# Altium PCB PCB_Платы-для-диплома_2_2026-05-31.pcbdoc
Units mm, origin at the board's own origin, x right, y up, seen from the top; angles counter-clockwise.
Board outline 126.75 x 88.39 mm, 2 copper layers (Top Layer, Bottom Layer); 15 components, 14 nets, 86 pads, 0 vias.
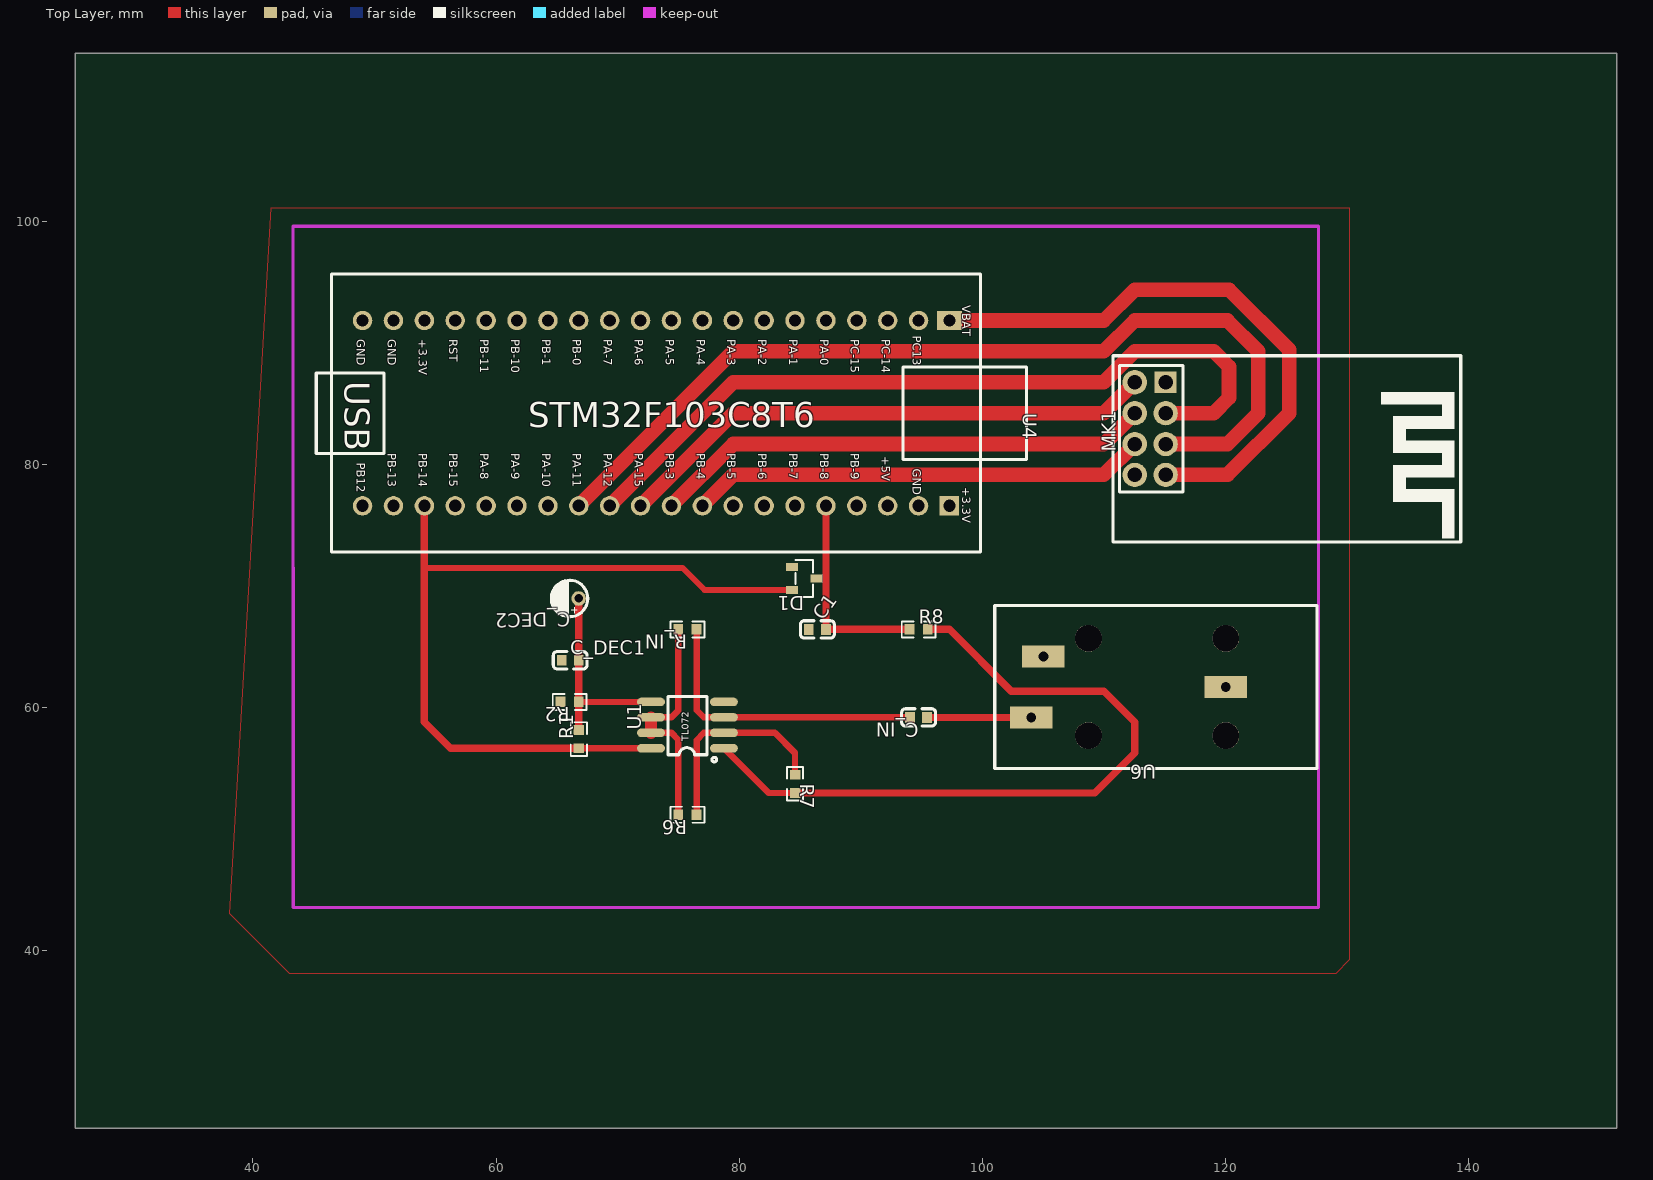
[diagram p0: Top Layer view]
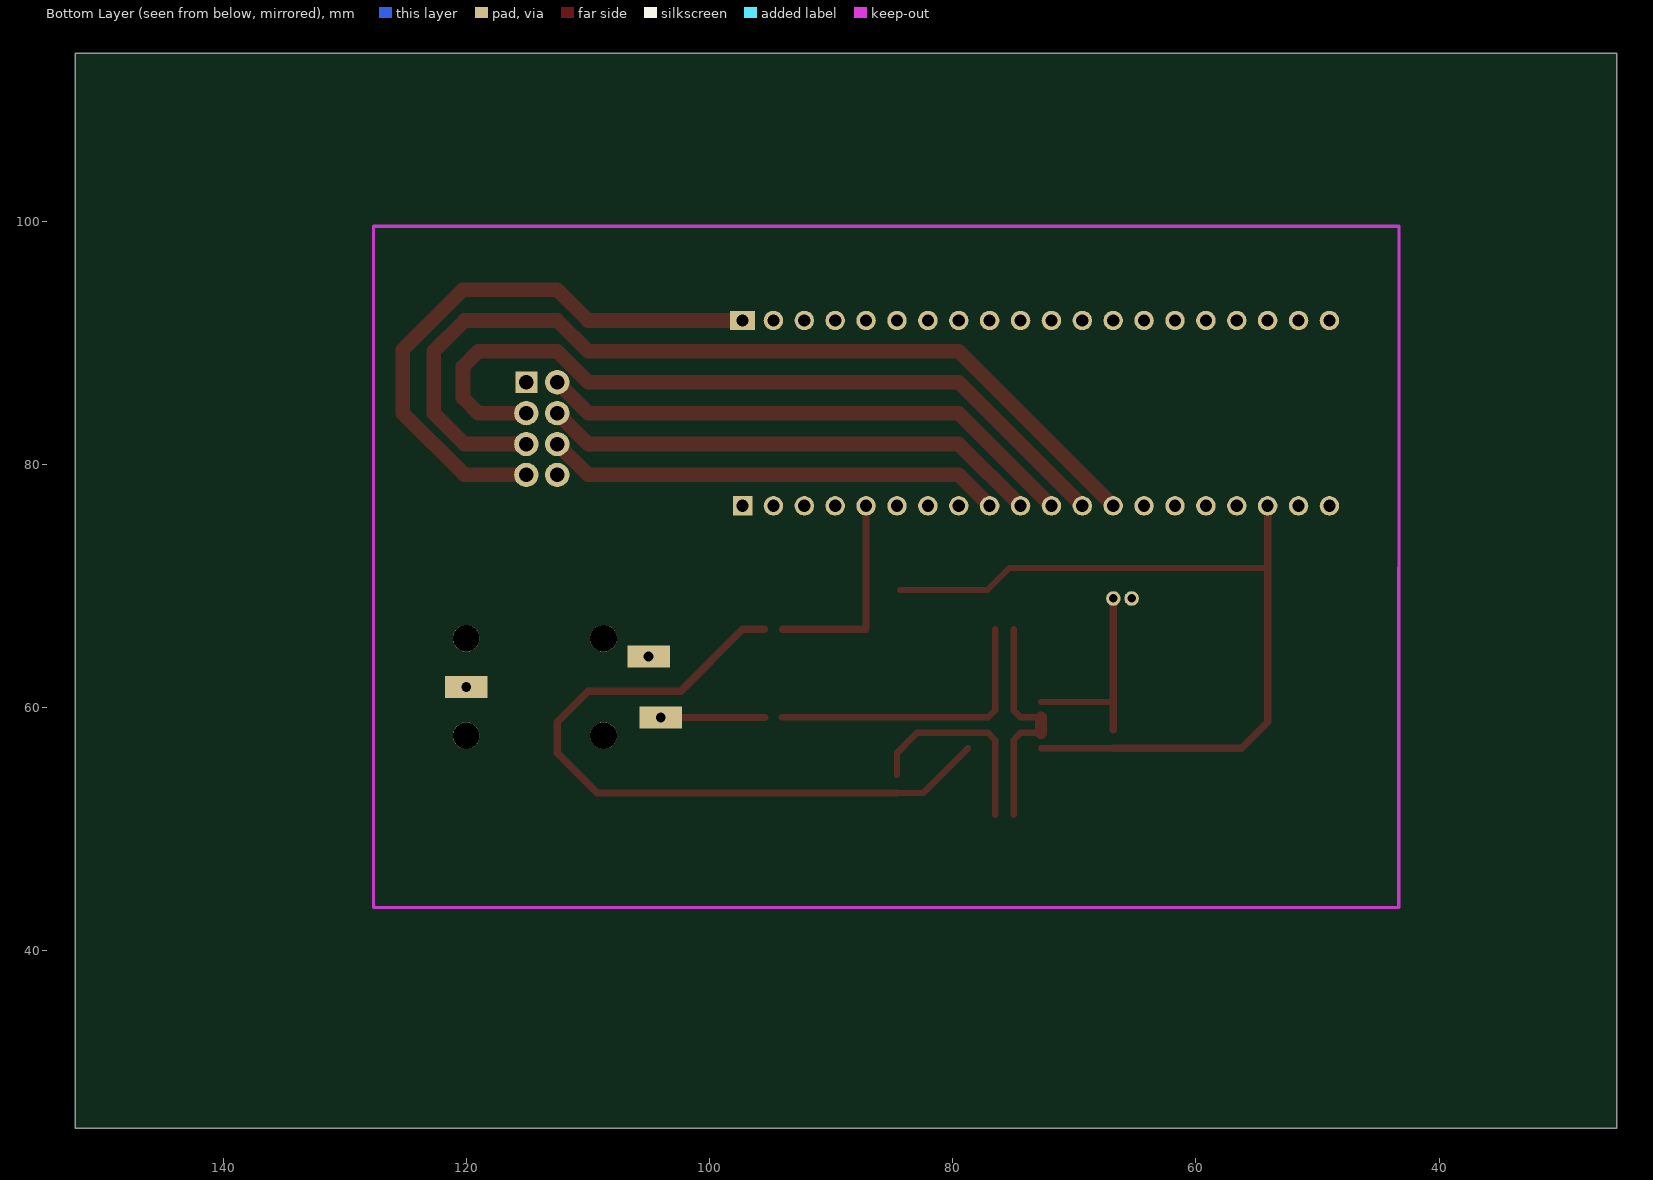
[diagram p1: Bottom Layer view, seen from below]

## Layer stack, top to bottom
Top Layer: signal copper (thickness not stored)
Dielectric: dielectric 0.32, FR-4, Dk 4.8
Bottom Layer: signal copper (thickness not stored)

## Board outline
152.149,25.4 25.4,25.4 25.4,113.792 152.149,113.792

## Components (designator, comment, footprint, x,y, rotation, side; value= is the part's Value field where it differs from the comment)
C1 "100pf" C0603 86.422,66.421 r0 top
C_DEC1 "0.1u" C0603 66.093,63.881 r0 top
C_DEC2 "10u" CAP-D3.0×F1.5 66.042,68.961 r180 top
C_IN "1u" C0603 94.742,59.182 r180 top
D1 "BAT54S-MS" SOT-23-3_L2.9-W1.3-P1.90-LS2.4-BR 85.344,70.612 r180 top
MK1 "2.4GHz" WIRELM-SMD_L28.6-W15.3-P2.54_NRF24L01 113.792,82.931 r90 top
R1 "1k" R0603 66.802,57.404 r90 top
R2 "1k" R0603 66.04,60.452 r180 top
R6 "10k" R0603 75.74,51.181 r180 top
R7 "47k" R0603 84.582,53.721 r270 top
R8 "1k" R0603 94.742,66.421 r0 top
R_IN "1M" R0603 75.74,66.421 r180 top
U1 "TL072" TL072 76.2,59.182 r90 top
U4 "Blue_Pill" "STM32F103C8T6-BLUEPILL 1" 74.422,84.201 r270 top
U6 "ST-008S-05" ST-008S-05 127.508,54.982 r180 top

## Footprints (in the part's own frame and the unit in brackets; to place one, negate y for a bottom-side part, rotate by r counter-clockwise, add the part's x,y. Pads: shape width x height; smd on the part's side, far side on the other; paste and mask are expansions set on the pad)
C0603 [mm]
  rect 0.8x0.9 smd paste+0 mask+0.051: 1(-0.7,0) 2(0.7,0)
  silkscreen extent -1.39,-0.71 1.39,0.71
CAP-D3.0×F1.5 [mm]
  round 1.2 hole 0.7 paste+0 mask+0.102: 1(-0.751,0) 2(0.751,0)
  silkscreen extent -1.5,-1.5 1.5,1.5
R0603 [mm]
  rect 0.806x0.864 smd paste-100 mask+0.051: 1(-0.753,0) 2(0.753,0)
  silkscreen extent -1.39,-0.66 1.39,0.66
SOT-23-3_L2.9-W1.3-P1.90-LS2.4-BR [mm]
  rect 1x0.65 smd paste+0 mask+0.051: 1(1,-0.95) 2(1,0.95) 3(-1,0)
  silkscreen extent -0.73,-1.53 0.73,1.53
ST-008S-05 [mm]
  rect 3.5x1.8 hole 0.8 paste+0 mask+0.051: 2(7.5,-6.7) 3(22.5,-9.2) 4(23.5,-4.2)
  round 2.2 hole 2.2 unplated paste+0: ""(7.5,-2.7) ""(7.5,-10.7) ""(18.8,-10.7) ""(18.8,-2.7)
  silkscreen extent 0,-13.4 26.5,0
"STM32F103C8T6-BLUEPILL 1" [mm]
  rect 1.6x2.032 hole 1 paste+0 mask+0.102: 1(-7.62,22.86)
  round 1.6 hole 1 paste+0 mask+0.102: 2(-7.62,20.32) 3(-7.62,17.78) 4(-7.62,15.24) 5(-7.62,12.7) 6(-7.62,10.16) 7(-7.62,7.62) 8(-7.62,5.08) 9(-7.62,2.54) 10(-7.62,0) 11(-7.62,-2.54) 12(-7.62,-5.08) 13(-7.62,-7.62) 14(-7.62,-10.16) 15(-7.62,-12.7) 16(-7.62,-15.24) 17(-7.62,-17.78) 18(-7.62,-20.32) 19(-7.62,-22.86) 20(-7.62,-25.4) 21(7.62,-25.4) 22(7.62,-22.86) 23(7.62,-20.32) 24(7.62,-17.78) 25(7.62,-15.24) 26(7.62,-12.7) 27(7.62,-10.16) 28(7.62,-7.62) 29(7.62,-5.08) 30(7.62,-2.54) 31(7.62,0) 32(7.62,2.54) 33(7.62,5.08) 34(7.62,7.62) 35(7.62,10.16) 36(7.62,12.7) 37(7.62,15.24) 38(7.62,17.78) 39(7.62,20.32)
  rect 1.6x1.6 hole 1 paste+0 mask+0.102: 40(7.62,22.86)
  silkscreen extent -11.43,-29.21 11.43,29.21
TL072 [mil]
  oval 27.56x90 smd paste+0 mask+4: 1(-100,-100) 2(-50,-100) 3(0,-100) 4(50,-100) 5(50,136.22) 6(0,136.22) 7(-50,136.22) 8(-100,136.22)
  silkscreen extent -144,-76 68,81
WIRELM-SMD_L28.6-W15.3-P2.54_NRF24L01 [mm]
  rect 1.8x1.8 hole 1.2 paste+0 mask+0.051: 1(3.807,-1.27)
  round 2 hole 1.2 paste+0 mask+0.051: 2(3.81,1.27) 3(1.27,-1.27) 4(1.27,1.27) 5(-1.27,-1.27) 6(-1.27,1.27) 7(-3.81,-1.27) 8(-3.81,1.27)
  silkscreen extent -9.31,-25.53 5.99,3.07

## Nets (pads, with @x,y where several pads share a name; then routed paths per layer and width w, separated by ;. In a path a pad name is that pad's centre, name@x,y a point inside that pad or via, vN(x,y) a via of type N, cw(c..) or ccw(c..) an arc to the next point about the centre after c; other vN are vias at no path point)
ADC_IN0: C1.2 D1.3 R8.1 U4.36 | length 17
  Top Layer w0.6: U4.36 C1.2 R8.1
C_DEC1_2: C_DEC1.2 C_DEC2.1 R1.2 R2.1 U1.5 | length 16.8
  Top Layer w0.525: R2.1 U1.5
  Top Layer w0.6: C_DEC1.2 R2.1 ; C_DEC1.2 C_DEC2.1 ; R1.2 R2.1@66.802,60.452
GND: C1.1 C_DEC1.1 C_DEC2.2 D1.1 MK1.8 R2.2 U1.4 U4.2 U4.21 U4.22 U6.2
IN: C_IN.1 U6.4 | length 8.6
  Top Layer w0.6: C_IN.1 U6.4
MK1_2: MK1.2 U4.30 | length 44.8
  Top Layer w1.2: U4.30 79.502,84.201 109.982,84.201 MK1.2
MK1_3: MK1.3 U4.29 | length 65
  Top Layer w1.2: U4.29 79.502,86.741 109.982,86.741 112.522,89.281 118.999,89.281 120.269,88.011 120.269,85.471 118.999,84.201 MK1.3
MK1_4: MK1.4 U4.31 | length 41.3
  Top Layer w1.2: U4.31 79.502,81.661 109.982,81.661 MK1.4
MK1_5: MK1.5 U4.28 | length 77
  Top Layer w1.2: U4.28 79.502,89.281 109.982,89.281 112.522,91.821 120.142,91.821 122.682,89.281 122.682,84.201 120.142,81.661 MK1.5
MK1_6: MK1.6 U4.32 | length 37.7
  Top Layer w1.2: U4.32 79.502,79.121 109.982,79.121 MK1.6
U1_1: R7.2 R8.2 U1.1 | length 59.4
  Top Layer w0.525: U1.1 82.414,52.968 R7.2
  Top Layer w0.6: R7.2 109.229,52.968 112.522,56.261 112.522,58.801 109.982,61.341 102.362,61.341 97.282,66.421 R8.2
U1_2: R6.1 R7.1 U1.2 | length 16.9
  Top Layer w0.525: R6.1 76.492,57.315 77.089,57.912 U1.2 82.931,57.912 84.582,56.261 R7.1
U1_3: C_IN.2 R_IN.1 U1.3 | length 24.4
  Top Layer w0.525: R_IN.1 76.492,59.779 77.089,59.182 U1.3 C_IN.2
V_REF: R6.2 R_IN.2 U1.6 U1.7 | length 19.1
  Top Layer w0.525: U1.7 74.422,57.912 74.986,57.348 R6.2 ; U1.6 74.422,59.182 74.986,59.746 R_IN.2
  Top Layer w1: U1.7 U1.6
VCC: D1.2 MK1.7 R1.1 U1.8 U4.1 U4.23 | length 116.8
  Top Layer w0.488: 54.102,71.483 75.329,71.483 77.15,69.662 D1.2
  Top Layer w0.525: R1.1 U1.8
  Top Layer w0.6: U4.23 54.102,58.801 56.252,56.651 R1.1
  Top Layer w1.2: U4.1 109.982,91.821 112.522,94.361 120.269,94.361 125.222,89.408 125.222,84.201 120.142,79.121 MK1.7
pads on no net: MK1.1 U4.3 U4.4 U4.5 U4.6 U4.7 U4.8 U4.9 U4.10 U4.11 U4.12 U4.13 U4.14 U4.15 U4.16 U4.17 U4.18 U4.19 U4.20 U4.24 U4.25 U4.26 U4.27 U4.33 U4.34 U4.35 U4.37 U4.38 U4.39 U4.40 U6. U6.3

## Polygon pours and split planes (outlines as drawn)
GND on Top Layer (solid): 41.529,101.092 130.175,101.092 130.175,39.243 129.032,38.1 43.053,38.1 38.1,43.053

## Text inside footprints (layer, text, board x,y; h text height)
U4: Top Overlay "VBAT" at 98.329,93.091 h0.7 r270; Top Overlay "PC13" at 94.265,90.551 h0.7 r270; Top Overlay "PC-14" at 91.725,90.297 h0.7 r270; Top Overlay "PC-15" at 89.185,90.297 h0.7 r270; Top Overlay "PA-0" at 86.645,90.297 h0.7 r270; Top Overlay "PA-1" at 84.105,90.297 h0.7 r270; Top Overlay "PA-2" at 81.565,90.297 h0.7 r270; Top Overlay "PA-3" at 79.025,90.297 h0.7 r270; Top Overlay "PA-4" at 76.485,90.297 h0.7 r270; Top Overlay "PA-5" at 73.945,90.297 h0.7 r270; Top Overlay "PA-6" at 71.405,90.297 h0.7 r270; Top Overlay "PA-7" at 68.865,90.297 h0.7 r270; Top Overlay "PB-0" at 66.325,90.297 h0.7 r270; Top Overlay "PB-1" at 63.785,90.297 h0.7 r270; Top Overlay "PB-10" at 61.245,90.297 h0.7 r270; Top Overlay "PB-11" at 58.705,90.297 h0.7 r270; Top Overlay "RST" at 56.165,90.297 h0.7 r270; Top Overlay "+3.3V" at 53.625,90.297 h0.7 r270; Top Overlay "GND" at 51.085,90.297 h0.7 r270; Top Overlay "GND" at 48.545,90.297 h0.7 r270; Top Overlay "+3.3V" at 98.329,78.105 h0.7 r270; Top Overlay "GND" at 94.265,79.629 h0.7 r270; Top Overlay "+5V" at 91.725,80.645 h0.7 r270; Top Overlay "PB-9" at 89.185,80.899 h0.7 r270; Top Overlay "PB-8" at 86.645,80.899 h0.7 r270; Top Overlay "PB-7" at 84.105,80.899 h0.7 r270; Top Overlay "PB-6" at 81.565,80.899 h0.7 r270; Top Overlay "PB-5" at 79.025,80.899 h0.7 r270; Top Overlay "PB-4" at 76.485,80.899 h0.7 r270; Top Overlay "PB-3" at 73.945,80.899 h0.7 r270; Top Overlay "PA-15" at 71.405,80.899 h0.7 r270; Top Overlay "PA-12" at 68.865,80.899 h0.7 r270; Top Overlay "PA-11" at 66.325,80.899 h0.7 r270; Top Overlay "PA-10" at 63.785,80.899 h0.7 r270; Top Overlay "PA-9" at 61.245,80.899 h0.7 r270; Top Overlay "PA-8" at 58.705,80.899 h0.7 r270; Top Overlay "PB-15" at 56.165,80.899 h0.7 r270; Top Overlay "PB-14" at 53.625,80.899 h0.7 r270; Top Overlay "PB-13" at 51.085,80.899 h0.7 r270; Top Overlay "PB12" at 48.545,80.137 h0.7 r270; Top Overlay "STM32F103C8T6" at 62.662,83.058 h2.03; Top Overlay "USB" at 47.559,86.817 h2.03 r270